# Altium PCB mask_v_0_0.PcbDoc
Units mm, origin at the board's own origin, x right, y up, seen from the top; angles counter-clockwise.
Board outline 29 x 33 mm, 4 copper layers (Top Layer, GND, PWR, Bottom Layer), stack 0.603 mm thick; 31 components, 32 nets, 150 pads, 146 vias.
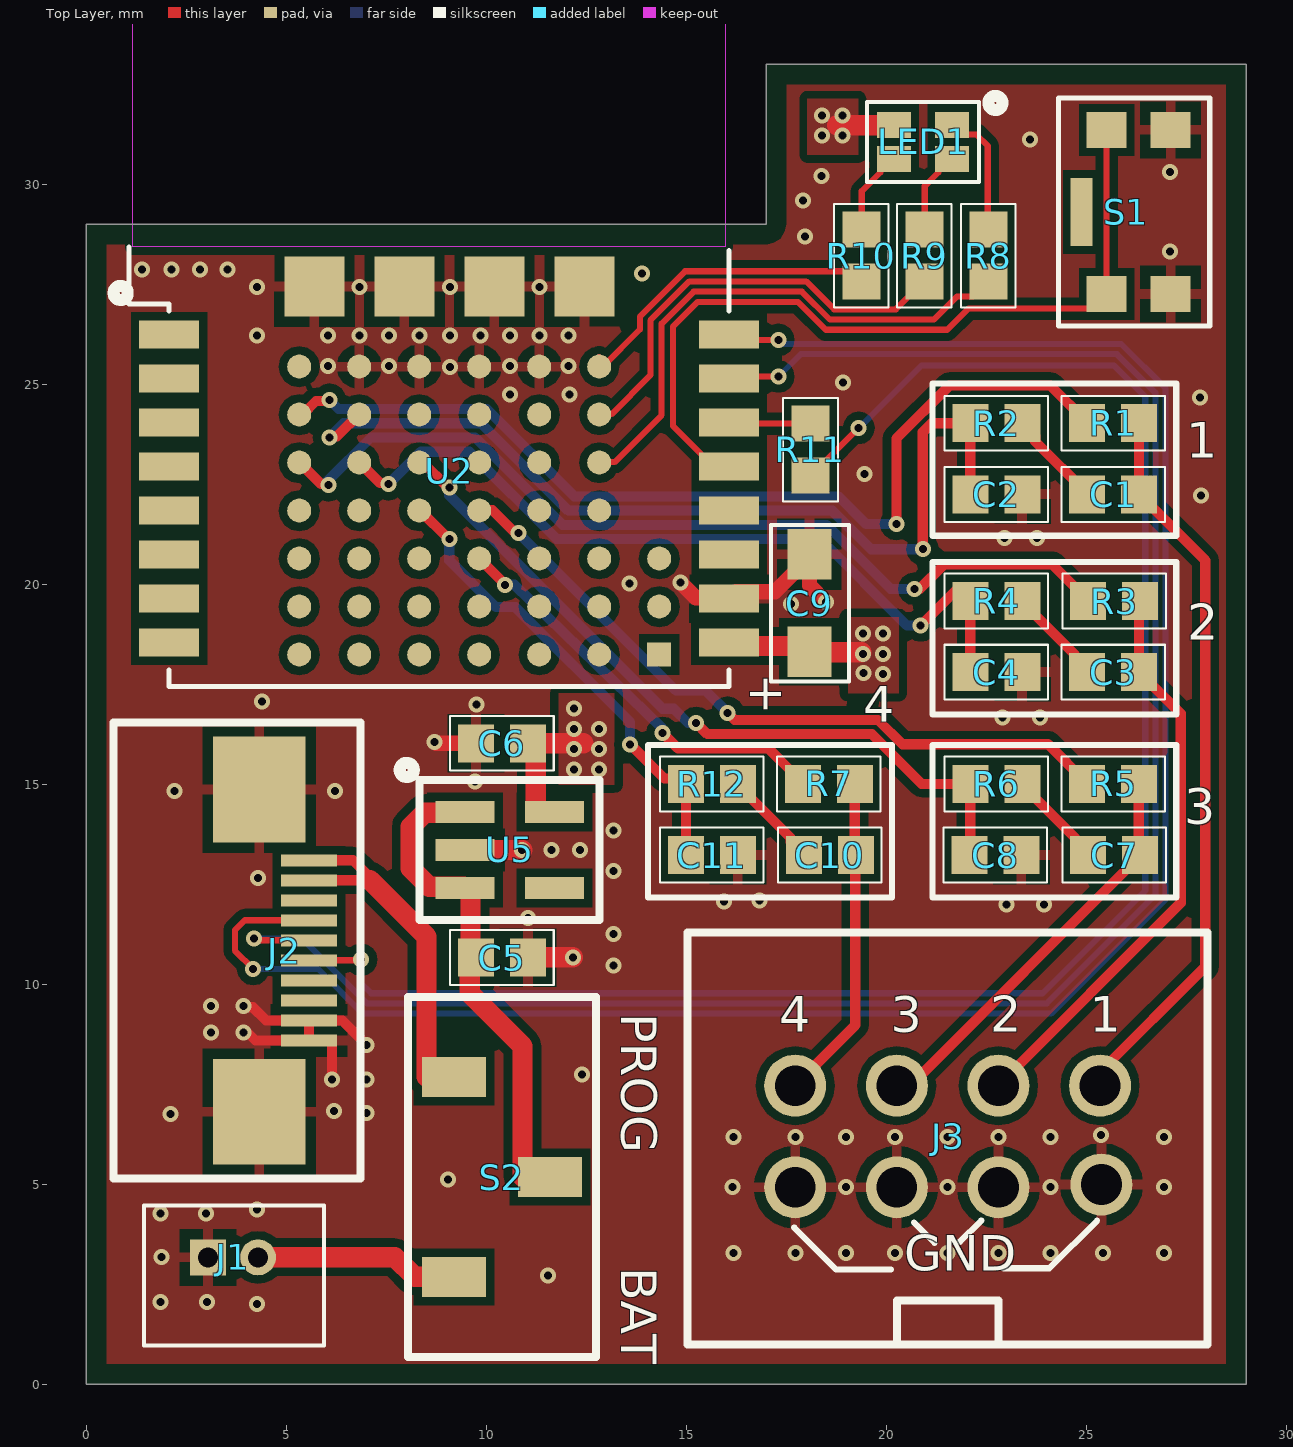
[diagram p0: Top Layer view]
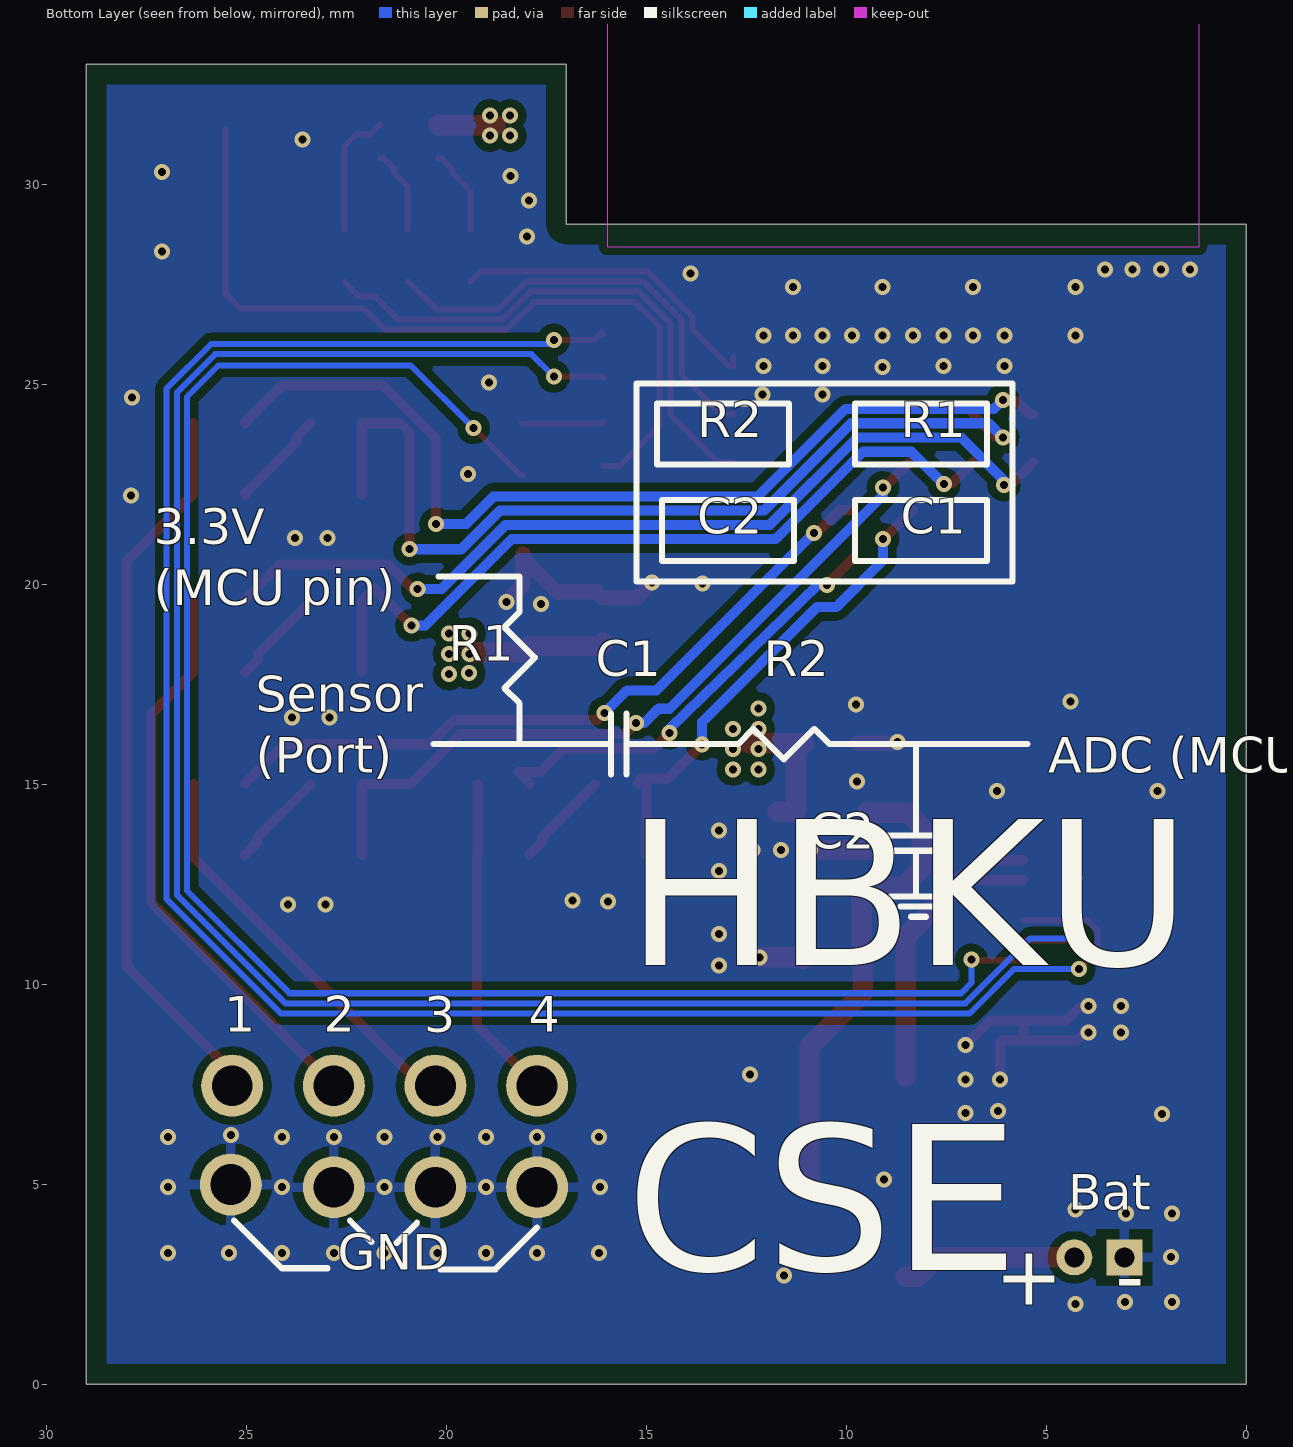
[diagram p1: Bottom Layer view, seen from below]
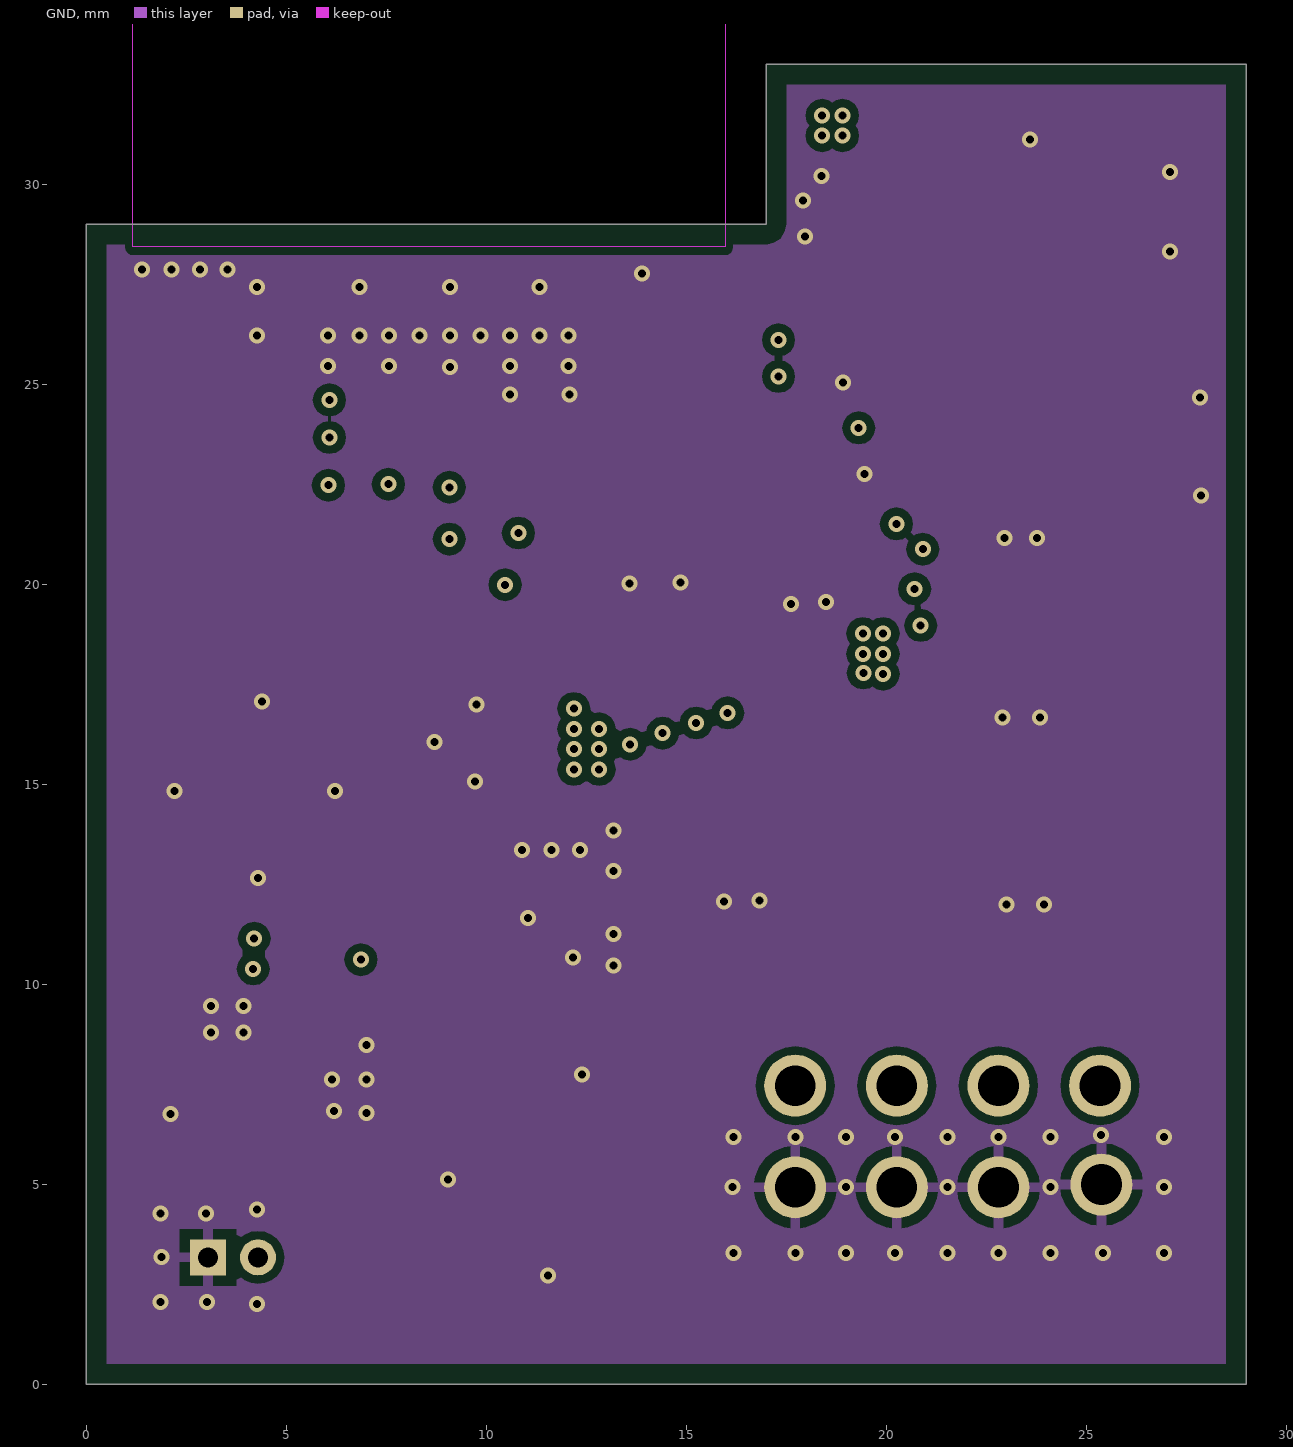
[diagram p2: GND]
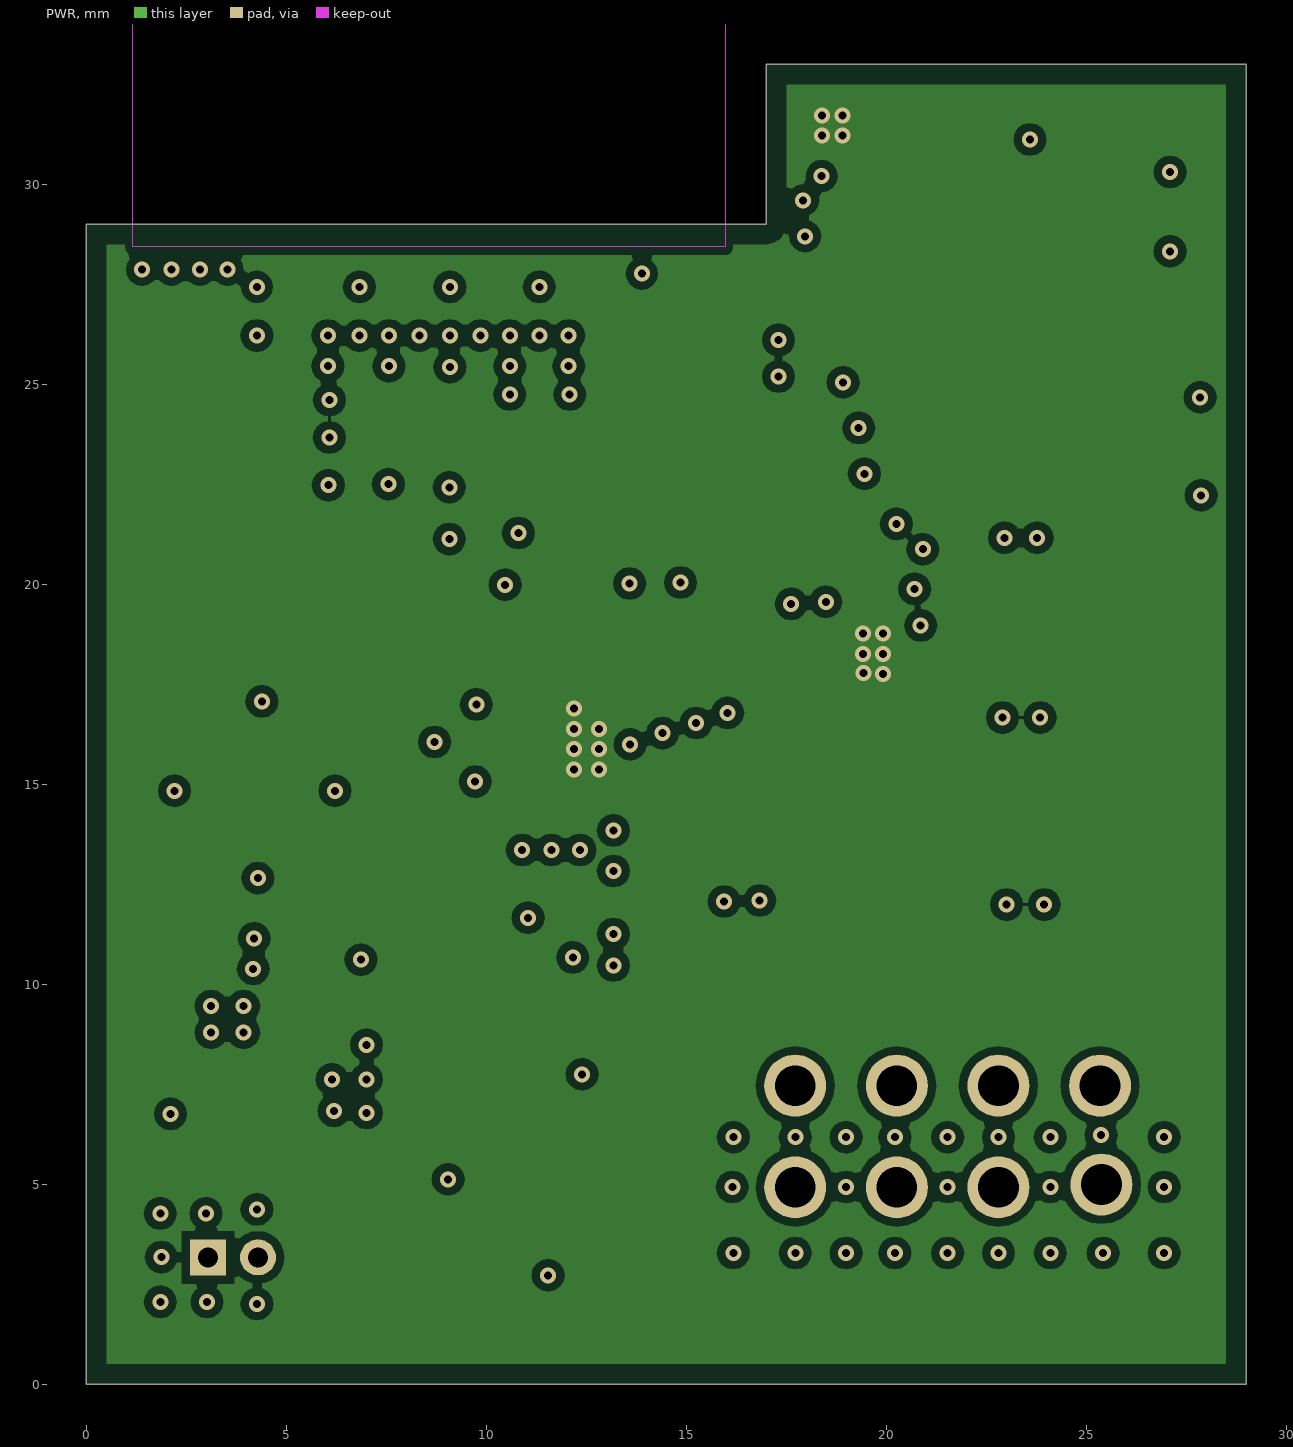
[diagram p3: PWR]

## Layer stack, top to bottom
Top Solder: solder mask 0.0102, Solder Resist, Dk 3.5
Top Layer: signal copper 0.0356
Dielectric 2: prepreg 0.0711, PP-006, Dk 4.1
GND: signal copper 0.035
Dielectric 1: dielectric 0.32, FR-4, Dk 4.8
PWR: signal copper 0.035
Dielectric 3: prepreg 0.0711, PP-006, Dk 4.1
Bottom Layer: signal copper 0.0356
Bottom Solder: solder mask 0.0102, Solder Resist, Dk 3.5

## Board outline
0,0 0,29 17,29 17,33 29,33 29,0

## Design rules (kind name [scope] priority, off if disabled: settings)
BoardOutlineClearance [All] p1: gap=0.5 ignorepadtopadclearanceinfootprint=FALSE
Clearance [All] p1: gap=0.102 ignorepadtopadclearanceinfootprint=FALSE except(0.203: Arc-Fill Arc-Poly Arc-Region Track-Fill Track-Poly Track-Region SMDPad-Fill SMDPad-Poly SMDPad-Region THPad-Fill THPad-Poly THPad-Region Via-Fill Via-Poly Via-Region Fill-Fill Fill-Poly Fill-Region Poly-Poly Poly-Region Region-Region; 0.254: Arc-Hole Track-Hole SMDPad-Hole THPad-Hole Via-Via Via-Hole Fill-Hole Poly-Hole Region-Hole Text-Hole)
ComponentClearance [All] p1: gap=0.102 collisioncheckmode=3 verticalgap=0.254 showdistances=FALSE
MinimumSolderMaskSliver [All] p1: minsoldermaskwidth=0.051
PlaneClearance [All] p1: clearance=0.254
PlaneConnect [All] p1: planeconnectstyle=Direct reliefexpansion=0.102 reliefentries=4 reliefconductorwidth=0.102 reliefairgap=0.102
PolygonConnect [All] p1: thpad.connectstyle=Relief thpad.reliefconductorwidth=0.254 thpad.reliefentries=4 thpad.polygonreliefangle="90 Angle" thpad.airgapwidth=0.254 smdpad.connectstyle=Relief smdpad.reliefconductorwidth=0.254 smdpad.reliefentries=4 smdpad.polygonreliefangle="90 Angle" smdpad.airgapwidth=0.254 via.connectstyle=Direct via.reliefconductorwidth=0.254 via.reliefentries=4 via.polygonreliefangle="90 Angle" via.airgapwidth=0.254
RoutingVias [All] p1: holewidth=0.2 width=1 viastyle="Through Hole" minholewidth=0.2 minwidth=0.4 maxholewidth=1 maxwidth=0.4
SilkToSilkClearance [All] p1: silktosilkclearance=0
SilkToSolderMaskClearance [IsPad] p1: minsilkscreentomaskgap=0.051 clearancetoexposedcopper=TRUE
SolderMaskExpansion [All] p1: expansion=0.102
Width "Schematic Width Constraint" [InNet('+3V3')] p1: maxlimit=2.54 minlimit=0.254 preferedwidth=0.508 midlayer1_maxwidth=0.254 midlayer1_prefwidth=0.254 midlayer2_maxwidth=0.254 midlayer2_prefwidth=0.254 minimp=50.000000 maximp=50.000000 favimp=50.000000
Width [All] p2: maxlimit=2.54 minlimit=0.102 preferedwidth=0.152
24 further rules are at their usual default settings.

## Components (designator, comment, footprint, x,y, rotation, side; value= is the part's Value field where it differs from the comment)
C1 "Multilayer Ceramic Capacitor" C0603_DNI 25.678,22.244 r180 top value=DNI
C2 "Multilayer Ceramic Capacitor" C0603_DNI 22.757,22.244 r180 top value=DNI
C3 "Multilayer Ceramic Capacitor" C0603_DNI 25.678,17.799 r180 top value=DNI
C4 "Multilayer Ceramic Capacitor" C0603_DNI 22.757,17.799 r180 top value=DNI
C5 "Multilayer Ceramic Capacitor" C0603 10.395,10.661 r180 top value=100nF
C6 "Multilayer Ceramic Capacitor" C0603 10.395,16.021 r0 top value=2.2uF
C7 "Multilayer Ceramic Capacitor" C0603_DNI 25.703,13.227 r180 top value=DNI
C8 "Multilayer Ceramic Capacitor" C0603_DNI 22.731,13.227 r180 top value=DNI
C9 "Tantalium capacitor" C1206 18.083,19.526 r90 top value=47uF
C10 "Multilayer Ceramic Capacitor" C0603_DNI 18.591,13.227 r180 top value=DNI
C11 "Multilayer Ceramic Capacitor" C0603_DNI 15.645,13.227 r180 top value=DNI
J1 "BAT_0530470210" "Bat 1.25 mm" 3.046,3.168 r0 top
J2 "FPC-10-pos" FPC10 3.859,10.839 r90 top
J3 "CON_4_2 CASE" CON_4_2_CASE 21.538,6.191 r0 top
LED1 "rgb_LTST-C19HE1WT" LTST-C19HE1WT-4_V 20.928,31.058 r270 top
R1 "RES DNI 0603" R0603_DNI 25.678,24.022 r180 top value=DNI
R2 "RES DNI 0603" R0603_DNI 22.757,24.022 r180 top value=DNI
R3 "RES DNI 0603" R0603_DNI 25.703,19.577 r180 top value=DNI
R4 "RES DNI 0603" R0603_DNI 22.757,19.577 r180 top value=DNI
R5 "RES DNI 0603" R0603_DNI 25.678,15.005 r180 top value=DNI
R6 "RES DNI 0603" R0603_DNI 22.757,15.005 r180 top value=DNI
R7 "RES DNI 0603" R0603_DNI 18.566,15.005 r180 top value=DNI
R8 "Thick Film" R0603 22.554,28.213 r270 top value=470R
R9 "Thick Film" R0603 20.953,28.213 r270 top value=470R
R10 "Thick Film" R0603 19.379,28.213 r270 top value=470R
R11 "Thick Film" R0603 18.109,23.361 r270 top value=0R
R12 "RES DNI 0603" R0603_DNI 15.645,15.005 r180 top value=DNI
S1 "KMR221GLFS" KMR221GLFS 26.313,29.305 r90 top
S2 "JS102011JCQN" JS102011JCQN 10.395,5.175 r270 top
U2 "BT840" BT840 9.077,22.838 r0 top
U5 "TPS73033DBVR" TPS73033DBV 10.59,13.354 r0 top

## Footprints (in the part's own frame and the unit in brackets; to place one, negate y for a bottom-side part, rotate by r counter-clockwise, add the part's x,y. Pads: shape width x height; smd on the part's side, far side on the other; paste and mask are expansions set on the pad)
"Bat 1.25 mm" [mm] "JST LiPo Connector"
  round 0.9 hole 0.5: 1(1.25,0)
  rect 0.9x0.9 hole 0.5: 2(0,0)
  silkscreen extent -1.6,-2.2 2.9,1.3, body extent -1.47,-2.02 2.78,1.18, height 4.28
BT840 [mm] "Bluetooth module nordic"
  rect 1.5x0.7 smd: 1(-7,3.4) 2(-7,2.3) 3(-7,1.2) 4(-7,0.1) 5(-7,-1) 6(-7,-2.1) 7(-7,-3.2) 8(-7,-4.3) 9(7,-4.3) 10(7,-3.2) 11(7,-2.1) 12(7,-1) 13(7,0.1) 14(7,1.2) 15(7,2.3) 16(7,3.4)
  round 0.6 smd: A0(-2.25,2.6) A1(-2.25,1.4) A2(-2.25,0.2) A3(-2.25,-1) A4(-2.25,-2.2) A5(-2.25,-3.4) A6(-2.25,-4.6) B0(-0.75,2.6) B1(-0.75,1.4) B2(-0.75,0.2) B3(-0.75,-1) B4(-0.75,-2.2) B5(-0.75,-3.4) B6(-0.75,-4.6) C0(0.75,2.6) C1(0.75,1.4) C2(0.75,0.2) C3(0.75,-1) C4(0.75,-2.2) C5(0.75,-3.4) C6(0.75,-4.6) D0(2.25,2.6) D1(2.25,1.4) D2(2.25,0.2) D3(2.25,-1) D4(2.25,-2.2) D5(2.25,-3.4) D6(2.25,-4.6) E0(3.75,2.6) E1(3.75,1.4) E2(3.75,0.2) E3(3.75,-1) E4(3.75,-2.2) E5(3.75,-3.4) E6(3.75,-4.6) F4(5.25,-2.2) F5(5.25,-3.4) Z0(-3.75,2.6) Z1(-3.75,1.4) Z2(-3.75,0.2) Z3(-3.75,-1) Z4(-3.75,-2.2) Z5(-3.75,-3.4) Z6(-3.75,-4.6)
  rect 1.5x1.5 smd: F0(-3.37,4.6) F1(-1.12,4.6) F2(1.13,4.6) F3(3.38,4.6)
  rect 0.6x0.6 smd: F6(5.25,-4.6)
  Keep-Out Layer region: -7.906,15.29 6.9,15.29 6.9,5.59 -7.906,5.59
  Keep-Out Layer region: -7.906,15.29 6.9,15.29 6.9,5.59 -7.906,5.59
  Keep-Out Layer region: -7.906,15.29 6.9,15.29 6.9,5.59 -7.906,5.59
  Keep-Out Layer region: -7.906,15.29 6.9,15.29 6.9,5.59 -7.906,5.59
  Keep-Out Layer region: -7.906,15.29 6.9,15.29 6.9,5.59 -7.906,5.59
  Keep-Out Layer region: -7.906,15.29 6.9,15.29 6.9,5.59 -7.906,5.59
  silkscreen extent -8.39,-5.4 7,5.59, body extent -8,-5.4 7,15.4, height 1.9
C0603 [mm] "non polarized"
  rect 0.9x0.95 smd: 1(-0.65,0) 2(0.65,0)
  silkscreen extent -1.3,-0.69 1.3,0.69, body extent -0.85,-0.45 0.85,0.45, height 0.87
C0603_DNI [mm] "non polarized"
  rect 0.9x0.95 smd: 1(-0.65,0) 2(0.65,0)
  silkscreen extent -1.3,-0.69 1.3,0.69
C1206 [mil] "polorized"
  rect 50x43 smd paste+0 mask+0: 1(-48,0) 2(48,0)
  silkscreen extent -77,-39 77,38, body extent -68,-36 66,36, height 73
CON_4_2_CASE [mm] "connector 2 row 4 col (8 pos) 2.54 pitch"
  round 1.55 hole 1.02: 1(-3.81,-1.27) 2(-1.27,-1.27) 3(1.27,-1.27) 4(3.846,-1.201) 5(3.81,1.27) 6(1.27,1.27) 7(-1.27,1.27) 8(-3.81,1.27)
  silkscreen extent -6.5,-5.2 6.5,5.1, body extent -6.27,-4.89 6.23,4.86, height 10.91
FPC10 [mil]
  rect 12x55 smd: 1(88.58,-67.5) 2(68.9,-67.5) 3(49.21,-67.5) 4(29.53,-67.5) 5(9.84,-67.5) 6(-9.84,-67.5) 7(-29.53,-67.5) 8(-49.21,-67.5) 9(-68.9,-67.5) 10(-88.58,-67.5)
  rect 104x91 smd: 11(-158.5,-18.5) 12(158.5,-18.5)
  silkscreen extent -224,-118 224,125, body extent -207,-83 207,110, height 72
JS102011JCQN [mm] "3 ways slide switch"
  rect 1x1.6 smd: 1(-2.5,-1.2) 2(0,1.2) 3(2.5,-1.2)
  silkscreen extent -4.5,-2.35 4.5,2.35, body extent -4.25,-2 4.25,2, height 5.12
KMR221GLFS [mm]
  rect 0.9x1 smd: 1(-2.05,0.8) 2(-2.05,-0.8) 3(2.05,-0.8) 4(2.05,0.8)
  rect 1.7x0.55 smd: 5(0,1.425)
  silkscreen extent -2.85,-1.78 2.85,2, body extent -2.3,-1.5 2.3,1.5, height 2.1
LTST-C19HE1WT-4_V [mm] "SMD, 4-Leads, Body 1.6x1.6mm, Pitch 0.85mm"
  rect 0.65x0.85 smd: 1(-0.425,0.725) 2(0.425,0.725) 3(0.425,-0.725) 4(-0.425,-0.725)
  silkscreen extent -1.15,-1.4 1,1.98, body extent -0.8,-0.8 0.8,0.8, height 0.35
R0603 [mm] "non polarized"
  rect 0.9x0.95 smd: 1(-0.65,0) 2(0.65,0)
  silkscreen extent -1.3,-0.69 1.3,0.69, body extent -0.8,-0.43 0.8,0.43, height 0.48
R0603_DNI [mm] "non polarized"
  rect 0.9x0.95 smd: 1(-0.65,0) 2(0.65,0)
  silkscreen extent -1.3,-0.69 1.3,0.69
TPS73033DBV [mil]
  rect 58x22 smd: 1(-44,37.4) 2(-44,0) 3(-44,-37.4) 4(44,-37.4) 5(44,37.4)
  silkscreen extent -108,-69 89,86, body extent -53,-59 45,59, height 41

## Part data
C1 C2 C3 C4 C7 C8 C10 C11: library part "Cap DNI 0603", "DNI (Do Not Install)"
C5: library part "Cap 100nF 0603 50V", "CAP CER 0.1UF 25V X7R 0603 EPOXY", Manufacturer="Vishay Vitramon", Manufacturer Part Number=VJ0603Y104KNXAO, Package=0603, Supplier Part Number=720-1235-1-ND, Voltage Rating=50V, LINK=https://www.digikey.co.uk/product-detail/en/VJ0603Y104KNXAO/720-1235-1-ND/2696621?utm_campaign=buynow&WT.z_cid=ref_octopart_dkc_buynow&utm_medium=aggregator&curr=gbp&site=us&utm_source=octopart, Supplier=Digikey
C6: library part "Cap 2.2uF 0603 50V", "CAP CER 2.2PF 50V C0G/NP0 0603", Manufacturer="Vishay Vitramon", Manufacturer Part Number=VJ0603A2R2CXACW1BC, Package=0603, Supplier Part Number=720-1836-1-ND, Voltage Rating=50V, LINK=https://www.digikey.com/product-detail/en/vishay-vitramon/VJ0603A2R2CXACW1BC/720-1836-1-ND/8564376, Supplier=Digikey
C9: library part "Cap 47uF 1206 6.3V", "CAP TANT 47UF 20% 6.3V 1206", Manufacturer="AVX Corporation", Manufacturer Part Number=F930J476MAA, Package=1206, Supplier Part Number=478-8180-2-ND, Voltage Rating=6.3V, LINK=https://www.digikey.com/product-detail/en/avx-corporation/F930J476MAA/478-8180-2-ND/4005131, Supplier=Digikey
J1: "CONN HEADER VERT 2POS 1.25MM", Manufacturer=Molex, Manufacturer Part Number=0530470210, Supplier Part Number=WM1731-ND, LINK=https://www.digikey.com/product-detail/en/molex/0530470210/WM1731-ND/242853, Price 1 Unit USD=0.19, Price 1000+ Units USD=0.06, Supplier=Digikey
J2: "CONN FFC TOP 10POS 0.50MM R/A  / FPC connector SFV10R-2STE1LF  10 positions", Manufacturer="Amphenol ICC (FCI)", Manufacturer Part Number=SFV10R-2STE1HLF, Supplier Part Number=609-4306-1-ND, zz Current Rating Per Pin=0.5A, LINK=https://www.digikey.com/product-detail/en/amphenol-icc-fci/SFV10R-2STE1HLF/609-4306-1-ND/2626757, Price 1 Unit USD=0.26, Price 1000+ Units USD=0.63, Supplier=Digikey
J3: "CONN HEADER VERT 8POS 2.54MM  / connector 2 row 4 col (8 pos) 2.54 pitch", Manufacturer=Molex, Manufacturer Part Number=0901301208, Supplier Part Number=WM8248-ND, zz Current Rating Per Pin=3A, zz Package="2 Row 8POS 2.54MM", LINK=https://www.digikey.co.uk/product-detail/en/molex/0901301208/WM8248-ND/760960, Price 1 Unit USD=1.73, Price 1000+ Units USD=0.83, Supplier=Digikey
LED1: "LED RGB DIFFUSED CHIP SMD / LED Tri-Color Blue/Green/Red, 5 V, -20 to 80 degC, 4-Pin SMD, RoHS, Tape and Reel", Manufacturer="Lite-On Inc.", Manufacturer Part Number=LTST-C19HE1WT, Supplier Part Number=160-2162-1-ND, zz Package=0606, zz Power Supply Rating="2.1V Red, 3.35V Green, 3.35V Blue", LINK=https://www.digikey.com/product-detail/en/lite-on-inc/LTST-C19HE1WT/160-2162-1-ND/4866310, Price 1 Unit USD=0.56, Price 1000+ Units USD=0.13, Supplier=Digikey
R1 R2 R3 R4 R5 R6 R7 R12: "DNI (Do Not Install)"
R8 R9 R10: library part "RES 470R 0603 1% 1/10W", "RES SMD 470 OHM 1% 1/10W 0603", Manufacturer=Panasonic, Manufacturer Part Number=ERJ-3EKF4700V, Package=0603, Power=1/10W, Supplier Part Number=P470HTR-ND, Tolerance=1%, LINK=https://www.digikey.co.uk/product-detail/en/panasonic-electronic-components/ERJ-3EKF4700V/P470HTR-ND/1746417, Supplier=Digikey
R11: library part "RES 0R 0603 1% 1/10W", "RES SMD 0 OHM JUMPER 1/10W 0603", Manufacturer=Panasonic, Manufacturer Part Number=ERJ-3GEY0R00V, Package=0603, Power=1/10W, Supplier Part Number=P0.0GCT-ND, Tolerance=1%, LINK=https://www.digikey.co.uk/product-detail/en/panasonic-electronic-components/ERJ-3GEY0R00V/P0.0GCT-ND/134711, Supplier=Digikey
S1: "SWITCH TACTILE SPST-NO 0.05A 32V  / Push Button Tactile", Manufacturer=C&K, Supplier Part Number=401-1427-2-ND, LINK=https://www.digikey.co.uk/product-detail/en/c-k/KMR221GLFS/401-1427-2-ND/550472, Manufacturer Part Number=KMR221GLFS, Price 1 Unit USD=0.52, Price 1000+ Units USD=0.23, Supplier=Digikey
S2: "SWITCH SLIDE SPDT 300MA 6V 3 ways", Manufacturer=C&K, Supplier Part Number=CKN10721CT-ND, LINK=https://www.digikey.com/product-detail/en/c-k/JS102011JCQN/CKN10721CT-ND/6137635, Manufacturer Part Number=JS102011JCQN, Price 1 Unit USD=0.67, Price 1000+ Units USD=0.37, Supplier=Digikey
U2: "BLUETOOTH MODULE FANSTEL  BT840", Manufacturer=Fanstel, Supplier Part Number=1914-1018-1-ND, LINK=https://www.digikey.com/product-detail/en/fanstel-corp/BT840/1914-1018-1-ND/8323671, Manufacturer Part Number=BT840, Price 1 Unit USD=12.06, Price 1000+ Units USD=6.56, Supplier=Digikey, zz Datasheet URL=http://www.fanstel.com/s/BlueNor_BT840F_datasheets.pdf
U5: "IC REG LINEAR 3.3V 200MA SOT23-5", Manufacturer="Texas Instruments", Supplier Part Number=296-17580-1-ND, zz Package=SOT-23-5, zz Power Supply Rating="up to 5.5V", LINK=https://www.digikey.com/product-detail/en/texas-instruments/TPS73033DBVR/296-17580-1-ND/705377, Manufacturer Part Number=TPS73033DBVR, Price 1 Unit USD=0.71, Price 1000+ Units USD=0.27, Supplier=Digikey

## Via types
v1: diameter 0.4, hole 0.2, Top Layer to Bottom Layer, tented both sides, 146 vias

## Nets (pads, with @x,y where several pads share a name; then routed paths per layer and width w, separated by ;. In a path a pad name is that pad's centre, name@x,y a point inside that pad or via, vN(x,y) a via of type N, cw(c..) or ccw(c..) an arc to the next point about the centre after c; other vN are vias at no path point)
+3V3: C6.2 C9.1 LED1.4 U2.9 U5.5 | length 8.2
  Top Layer w0.508: C6.2 C6.2@11.054,16.021 ; C6.2@11.047,16.027 C6.2@11.054,16.021 ; C6.2@11.243,15.831 11.243,14.336 11.268,14.31 U5.5@11.709,14.31 ; 12.427,16.021 C6.2@11.054,16.021 ; U2.9@16.077,18.55 16.173,18.454 17.924,18.454 18.084,18.294 v1@19.379,18.294 ; 18.771,31.471 20.191,31.471 LED1.4
  other v1: 12.192,15.367 12.827,15.367 12.192,15.875 12.827,15.875 12.192,16.383 12.827,16.383 12.192,16.891 19.925,17.748 19.431,17.78 19.417,18.256 19.925,18.256 19.417,18.764 19.925,18.764 18.401,31.21 18.909,31.21 18.401,31.718 18.909,31.718
+3V7_BAT: J1.1 S2.3 | length 4.4
  Top Layer w0.508: J1.1@4.293,3.175 7.718,3.175 8.211,2.682 S2.3@8.511,2.682
+5Vprog: J2.1 J2.2 S2.1 | length 8.8
  Top Layer w0.254: J2.2@5.575,12.596 6.993,12.596 7.098,12.49 ; J2.1@5.575,13.096 6.67,13.096 7.098,12.668 7.098,12.596
  Top Layer w0.508: 7.098,12.596 8.511,11.183 S2.1@8.511,7.682
+Vin: C5.2 S2.2 U5.1 U5.3 | length 12.1
  Top Layer w0.508: U5.1@9.474,14.31 9.449,14.285 8.461,14.285 8.114,13.938 8.114,12.897 8.575,12.436 9.449,12.436 9.474,12.41 9.585,12.41 9.611,12.385 9.611,10.804 9.747,10.668 9.587,10.508 9.587,9.772 10.911,8.449 S2.2@10.911,5.182
BUTTON: S1.1 S1.4 U2.13 | length 20.2
  Top Layer w0.152: U2.13@16.077,22.95 15.677,22.95 14.667,23.959 14.667,26.435 15.282,27.05 17.801,27.05 18.492,26.359 21.527,26.359 22.056,26.888 25.141,26.888 25.514,27.262 S1.4@25.514,31.362
GND: C2.1 C4.1 C5.1 C6.1 C8.1 C9.2 C11.1 J1.2 J2.9 J2.10 J2.11 J2.12 J3.1 J3.2 J3.3 J3.4 S1.2 S1.3 U2.10 U2.A0 U2.B0 U2.C0 U2.D0 U2.F0 U2.F1 U2.F2 U2.F3 U5.2 | length 16
  Top Layer w0.254: v1@3.962,8.788 4.037,8.788 4.236,8.589 J2.10 ; v1@3.962,9.423 4.166,9.423 4.5,9.089 J2.9 ; v1(6.147,7.62) 6.147,8.56 6.117,8.589 J2.10 ; v1(7.01,8.484) 6.405,9.089 J2.9 ; J2.10 J2.9
  Top Layer w0.381: v1(8.712,16.053) 8.744,16.021 C6.1@9.737,16.021 ; v1(14.859,20.041) 15.242,19.657 U2.10@16.084,19.657 ; U2.10@16.077,19.65 16.236,19.81 17.224,19.81 18.071,20.656 C9.2@18.071,20.745 ; C9.2 18.083,19.966 v1(18.491,19.558)
  Top Layer w0.508: U5.2 v1(10.903,13.354) ; C5.1@11.037,10.661 11.081,10.617 11.132,10.668 v1(12.167,10.668)
  other v1: 4.267,2.007 1.854,2.057 3.023,2.057 11.552,2.721 1.88,3.175 16.18,3.277 17.729,3.277 18.999,3.277 20.218,3.277 21.539,3.277 22.809,3.277 24.105,3.277 25.425,3.277 26.949,3.277 1.854,4.267 2.997,4.267 4.267,4.369 16.154,4.928 18.999,4.928 21.539,4.928 24.105,4.928 26.949,4.928 9.052,5.121 16.18,6.172 17.729,6.172 18.999,6.172 20.218,6.172 21.539,6.172 22.809,6.172 24.105,6.172 26.949,6.172 25.375,6.223 2.108,6.756 7.01,6.782 6.198,6.833 7.01,7.62 12.402,7.746 3.124,8.788 3.937,8.788 3.124,9.449 3.937,9.449 13.183,10.465 13.183,11.252 11.049,11.659 23.012,11.989 23.952,11.989 15.951,12.065 16.84,12.09 4.293,12.649 13.183,12.827 11.633,13.354 12.344,13.354 13.183,13.843 2.21,14.834 6.223,14.834 9.728,15.062 22.911,16.662 23.851,16.662 9.754,16.993 4.394,17.069 17.628,19.507 13.589,20.015 22.962,21.158 23.774,21.158 27.877,22.221 19.456,22.758 27.852,24.671 10.592,24.74 12.09,24.74 18.927,25.046 9.093,25.425 6.045,25.451 7.569,25.451 10.592,25.451 12.065,25.451 4.267,26.213 6.045,26.213 6.833,26.213 7.569,26.213 8.331,26.213 9.093,26.213 9.855,26.213 10.592,26.213 11.328,26.213 12.065,26.213 4.267,27.432 6.833,27.432 9.093,27.432 11.328,27.432 13.894,27.762 1.397,27.864 2.134,27.864 2.845,27.864 3.531,27.864 27.102,28.321 17.977,28.696 17.927,29.596 18.39,30.201 27.102,30.302 23.597,31.115
LED_B: R10.2 U2.E0 | length 8.1
  Top Layer w0.152: U2.E0@12.827,25.672 12.827,25.45 12.928,25.45 13.843,26.365 13.843,26.688 14.977,27.822 19.132,27.822 R10.2@19.391,27.563
LED_G: R9.2 U2.E1 | length 10.9
  Top Layer w0.152: U2.E1@12.827,24.25 13.136,24.25 14.109,25.223 14.109,26.594 15.082,27.568 18.001,27.568 18.702,26.867 20.245,26.867 20.941,27.563 R9.2@20.966,27.563
LED_R: R8.2 U2.E2 | length 13.5
  Top Layer w0.152: U2.E2@12.827,23.05 13.213,23.05 14.388,24.225 14.388,26.515 15.187,27.314 17.896,27.314 18.597,26.613 21.192,26.613 21.769,27.189 22.167,27.189 R8.2@22.541,27.563
NetJ2_6: J2.6 R11.2 | length 44.9
  Top Layer w0.152: J2.6@5.575,10.596 6.855,10.596 v1(6.87,10.611) ; R11.2@18.096,22.711 18.121,22.711 v1(19.316,23.906)
  Bottom Layer w0.152: v1(6.87,10.611) 6.87,10.028 7.125,9.772 23.913,9.772 26.478,12.338 26.478,24.682 25.691,25.47 20.89,25.47 19.326,23.906 v1(19.316,23.906)
NetLED1_1: LED1.1 R8.1 | length 3.2
  Top Layer w0.152: LED1.1@21.655,31.489 21.903,31.24 22.257,31.24 22.541,30.956 R8.1@22.541,28.863
NetLED1_2: LED1.2 R9.1 | length 2.1
  Top Layer w0.152: R9.1@20.966,28.863 20.966,29.951 21.306,30.29 21.306,30.39 21.555,30.639 LED1.2@21.655,30.639
NetLED1_3: LED1.3 R10.1 | length 2.2
  Top Layer w0.152: R10.1@19.391,28.863 19.391,29.826 19.856,30.29 19.856,30.39 20.105,30.639 LED1.3@20.205,30.639
Reset_n: R11.1 U2.14 | length 2
  Top Layer w0.152: U2.14@16.084,24.057 16.129,24.011 R11.1
Sensor_1_ADC: C2.2 R2.2 U2.A1 | length 23.3
  Top Layer w0.254: v1(6.082,23.666) 6.11,23.694 6.271,23.694 U2.A1@6.827,24.25 ; v1(20.916,20.872) 20.916,23.798 21.139,24.022 22.105,24.022 C2.2@22.105,22.244
  Bottom Layer w0.254: v1(6.082,23.666) 6.438,24.022 9.872,24.022 12.056,21.837 18.655,21.837 19.62,20.872 v1(20.916,20.872)
Sensor_1_input: C1.1 J3.5 R1.1 | length 18.3
  Top Layer w0.254: J3.5@25.335,7.461 25.335,7.791 27.977,10.433 27.977,20.593 26.326,22.244 R1.1@26.326,24.022
Sensor_1_net_1: C1.2 R2.1 | length 2.4
  Top Layer w0.254: R2.1@23.405,24.022 23.728,23.699 23.728,23.567 25.026,22.269 C1.2@25.026,22.244
Sensor_1_pwr: R1.2 U2.Z1 | length 24.2
  Top Layer w0.254: U2.Z1@5.327,24.25 5.42,24.25 5.748,24.578 6.054,24.578 v1(6.082,24.606) ; v1(20.255,21.507) 20.255,23.641 21.576,24.962 24.111,24.962 25.026,24.047 R1.2@25.026,24.022
  Bottom Layer w0.254: v1(6.082,24.606) 6.311,24.377 10.019,24.377 12.204,22.193 18.808,22.193 19.493,21.507 v1(20.255,21.507)
Sensor_2_ADC: C4.2 R4.2 U2.A2 | length 19.9
  Top Layer w0.254: U2.A2@6.827,23.05 7.351,22.526 7.527,22.526 v1(7.555,22.498) ; v1(20.865,18.967) 21.79,19.892 22.105,19.577 C4.2@22.105,17.799
  Bottom Layer w0.254: v1(7.555,22.498) 8.368,23.311 9.577,23.311 11.762,21.126 18.361,21.126 20.52,18.967 v1(20.865,18.967)
Sensor_2_input: C3.1 J3.6 R3.1 | length 14.4
  Top Layer w0.254: J3.6@22.795,7.461 27.367,12.033 27.367,16.757 26.326,17.799 26.326,19.562 R3.1@26.341,19.577
Sensor_2_net_1: C3.2 R4.1 | length 2.4
  Top Layer w0.254: R4.1@23.405,19.577 23.405,19.552 24.703,18.254 24.703,18.122 C3.2@25.026,17.799
Sensor_2_pwr: R3.2 U2.Z2 | length 22.8
  Top Layer w0.254: U2.Z2@5.327,23.05 5.876,22.5 6.029,22.5 v1(6.057,22.472) ; v1(20.713,19.882) 20.84,19.882 21.449,20.491 24.152,20.491 25.041,19.602 R3.2@25.041,19.577
  Bottom Layer w0.254: v1(6.057,22.472) 6.031,22.498 6.031,22.574 7.124,23.666 9.725,23.666 11.909,21.482 18.508,21.482 20.108,19.882 v1(20.713,19.882)
Sensor_3_ADC: C8.2 R6.2 U2.B2 | length 19
  Top Layer w0.254: U2.B2@8.327,23.05 8.411,23.05 9.04,22.422 v1(9.079,22.422) ; v1(15.252,16.529) 15.531,16.249 19.646,16.249 20.89,15.005 22.105,15.005 22.105,13.242 C8.2@22.09,13.227
  Bottom Layer w0.254: v1(9.079,22.422) 9.079,22.218 14.413,16.884 14.693,16.884 15.048,16.529 v1(15.252,16.529)
Sensor_3_input: C7.1 J3.7 R5.1 | length 10.3
  Top Layer w0.254: J3.7@20.255,7.461 20.6,7.461 26.341,13.202 26.341,13.227 26.316,13.252 R5.1@26.316,15.005
Sensor_3_net_1: C7.2 R6.1 | length 2.5
  Top Layer w0.254: R6.1@23.405,15.005 23.405,14.98 24.718,13.667 24.718,13.55 C7.2@25.041,13.227
Sensor_3_pwr: R5.2 U2.C3 | length 18
  Top Layer w0.254: U2.C3@9.827,21.85 10.159,21.85 10.73,21.279 v1(10.807,21.279) ; v1(16.039,16.783) 16.217,16.605 19.798,16.605 20.408,15.995 24.05,15.995 25.016,15.03 R5.2@25.016,15.005
  Bottom Layer w0.254: v1(10.807,21.279) 14.744,17.342 15.48,17.342 v1(16.039,16.783)
Sensor_4_ADC: C11.2 R12.2 U2.B3 | length 12.2
  Top Layer w0.254: U2.B3@8.327,21.85 8.341,21.85 9.065,21.126 v1(9.079,21.126) ; v1(13.601,15.995) 14.46,15.136 R12.2@15.125,15.136 ; C11.2@14.993,13.227 14.993,15.005 R12.2 R12.2@15.201,15.005
  Bottom Layer w0.254: v1(9.079,21.126) 9.079,20.593 10.248,19.424 10.73,19.424 13.601,16.554 v1(13.601,15.995)
Sensor_4_input: C10.1 J3.8 R7.1 | length 8.2
  Top Layer w0.254: J3.8@17.715,7.461 19.229,8.975 19.229,13.227 19.214,13.242 R7.1@19.214,15.005
Sensor_4_net_1: C10.2 R12.1 | length 2.5
  Top Layer w0.254: R12.1@16.293,15.005 16.293,14.98 17.606,13.667 17.606,13.55 C10.2@17.929,13.227
Sensor_4_pwr: R7.2 U2.C4 | length 11
  Top Layer w0.254: U2.C4@9.827,20.65 9.827,20.641 10.476,19.992 v1(10.476,19.983) ; v1(14.413,16.275) 14.794,15.894 17.055,15.894 17.648,15.301 18.185,15.301 17.914,15.03 R7.2@17.914,15.005
  Bottom Layer w0.254: v1(10.476,19.983) 10.705,19.983 14.413,16.382 v1(14.413,16.275)
SWCLK: J2.5 U2.15 | length 49.6
  Top Layer w0.152: v1(4.203,11.144) 4.251,11.096 J2.5@5.575,11.096 ; U2.15@16.077,25.15 16.117,25.19 v1(17.309,25.19)
  Bottom Layer w0.152: v1(4.203,11.144) 5.395,11.144 7.02,9.518 24.018,9.518 26.732,12.233 26.732,24.787 25.771,25.749 17.868,25.749 v1(17.309,25.19)
SWDIO: J2.4 U2.16 | length 51.8
  Top Layer w0.152: v1(4.177,10.382) 3.72,10.839 3.72,11.347 3.969,11.596 J2.4@5.575,11.596 ; U2.16@16.077,26.25 16.109,26.282 16.287,26.105 v1(17.309,26.105)
  Bottom Layer w0.152: v1(4.177,10.382) 5.797,10.382 6.915,9.264 24.123,9.264 26.986,12.127 26.986,24.893 25.876,26.003 17.411,26.003 v1(17.309,26.105)
pads on no net: J2.3 J2.7 J2.8 S1.5 U2.1 U2.2 U2.3 U2.4 U2.5 U2.6 U2.7 U2.8 U2.11 U2.12 U2.A3 U2.A4 U2.A5 U2.A6 U2.B1 U2.B4 U2.B5 U2.B6 U2.C1 U2.C2 U2.C5 U2.C6 U2.D1 U2.D2 U2.D3 U2.D4 U2.D5 U2.D6 U2.E3 U2.E4 U2.E5 U2.E6 U2.F4 U2.F5 U2.F6 U2.Z0 U2.Z3 U2.Z4 U2.Z5 U2.Z6 U5.4

## Polygon pours and split planes (outlines as drawn)
GND on Top Layer "GND_TOP_LAYER" (solid, remove dead copper, pour order 32): 0,0 29,0 29,33 17,33 17,29 0,29
+3V3 on Top Layer "+3V3_L01_P028" (solid, remove dead copper, pour order 28): 18.034,32.131 19.304,32.131 19.304,30.734 18.034,30.734
+3V3 on Top Layer "+3V3_L01_P030" (solid, remove dead copper, pour order 30): 19.05,19.177 20.32,19.177 20.32,17.272 19.05,17.272
+3V3 on Top Layer "+3V3_L01_P026" (solid, remove dead copper, pour order 26): 11.811,17.272 13.208,17.272 13.208,14.986 11.811,14.986
GND on Bottom Layer "GND_BOTTOM_LAYER" (solid, remove dead copper, pour order 34): 0,0 29,0 29,33 17,33 17,29 0,29
+3V3 on PWR "+3V3_PWR_LAYER" (solid, remove dead copper, pour order 36): 0,0 0,29 17,29 17,33 29,33 29,0
GND on GND "GND_LAYER" (solid, remove dead copper, pour order 38): 0,0 0,29 17,29 17,33 29,33 29,0

## Silkscreen, mask and mechanical layers (free items; w line width, h text height)
Top Overlay:
  lines w0.152: 17.704,3.912 18.745,2.87 20.117,2.87 ; 20.701,4.039 21.209,3.531 ; 21.844,3.556 22.377,4.089 ; 22.936,2.896 23.724,2.896 24.079,2.896 25.273,4.089 ; 14.046,12.167 20.142,12.167 20.142,15.977 14.046,15.977 14.046,12.167 ; 21.158,12.167 21.158,15.977 27.254,15.977 27.254,12.167 21.158,12.167 ; 21.158,16.739 27.254,16.739 27.254,20.549 21.158,20.549 21.158,16.739 ; 21.158,21.209 27.254,21.209 27.254,25.019 21.158,25.019 21.158,21.209
  text "1" at 27.508,22.86 h1.52
  text "2" at 27.534,18.313 h1.52
  text "4" at 19.431,16.256 h1.52
  text "3" at 27.457,13.691 h1.52
  text "PROG" at 13.081,9.271 h1.52 r270
  text "4" at 17.323,8.509 h1.52
  text "3" at 20.117,8.498 h1.52
  text "2" at 22.606,8.505 h1.52
  text "1" at 25.095,8.51 h1.52
  text "BAT" at 13.081,2.921 h1.52 r270
  text "GND" at 20.447,2.54 h1.52
Bottom Overlay:
  lines w0.152: 5.461,16.002 10.414,16.002 10.795,16.383 11.557,15.621 12.319,16.383 12.7,16.002 15.494,16.002 ; 7.493,12.192 8.89,12.192 ; 7.493,13.335 9.017,13.335 ; 7.493,13.716 9.017,13.716 ; 7.747,11.938 8.636,11.938 ; 8.001,11.684 8.382,11.684 ; 8.255,12.192 8.255,13.335 ; 8.255,13.716 8.255,16.002 ; 15.494,15.24 15.494,16.764 ; 15.875,15.24 15.875,16.764 ; 15.875,16.002 19.685,16.002 ; 17.729,3.912 18.771,2.87 20.142,2.87 ; 20.193,20.193 18.161,20.193 18.161,19.304 18.542,18.923 17.78,18.161 18.542,17.399 18.161,17.018 18.161,16.002 19.177,16.002 20.32,16.002 ; 20.726,4.039 21.234,3.531 ; 21.869,3.556 22.403,4.089 ; 22.962,2.896 23.749,2.896 24.105,2.896 25.298,4.089 ; 5.842,20.066 15.24,20.066 15.24,25.019 5.842,25.019 5.842,20.066 ; 6.477,20.574 9.779,20.574 9.779,22.098 6.477,22.098 6.477,20.574 ; 6.477,22.987 9.779,22.987 9.779,24.511 6.477,24.511 6.477,22.987 ; 11.303,20.574 14.605,20.574 14.605,22.098 11.303,22.098 11.303,20.574 ; 11.43,22.987 14.732,22.987 14.732,24.511 11.43,24.511 11.43,22.987
  text "R1" at 8.636,23.368 h1.52
  text "R2" at 13.716,23.368 h1.52
  text "C1" at 8.636,20.955 h1.52
  text "C2" at 13.716,20.955 h1.52
  text "3.3V / (MCU pin)" at 27.305,19.177 h1.52
  text "R1" at 19.939,17.78 h1.52
  text "R2" at 12.065,17.399 h1.52
  text "C1" at 16.256,17.399 h1.52
  text "ADC (MCU)" at 4.953,14.986 h1.52
  text "Sensor / (Port)" at 24.765,14.986 h1.52
  text "C2" at 10.922,13.081 h1.52
  text "4" at 17.932,8.509 h1.52
  text "3" at 20.549,8.498 h1.52
  text "2" at 23.063,8.505 h1.52
  text "1" at 25.552,8.505 h1.52
  text "Bat" at 4.445,4.064 h1.52
  text "GND" at 22.708,2.565 h1.52
  text "-  +" at 2.54,1.499 h2.54
  text "HBKU / CSE" at 15.494,1.397 h7.62
Board Outline:
  the board outline again, w0.2

## Text inside footprints (layer, text, board x,y; h text height)
C9: Top Overlay "+" at 17.677,16.732 h1.52 r90